# Altium PCB Wien_PCB.PcbDoc
Units mm, origin at the board's own origin, x right, y up, seen from the top; angles counter-clockwise.
Board outline 50.02 x 50.02 mm, 2 copper layers (Top Layer, Bottom Layer); 15 components, 11 nets, 39 pads, 4 vias.
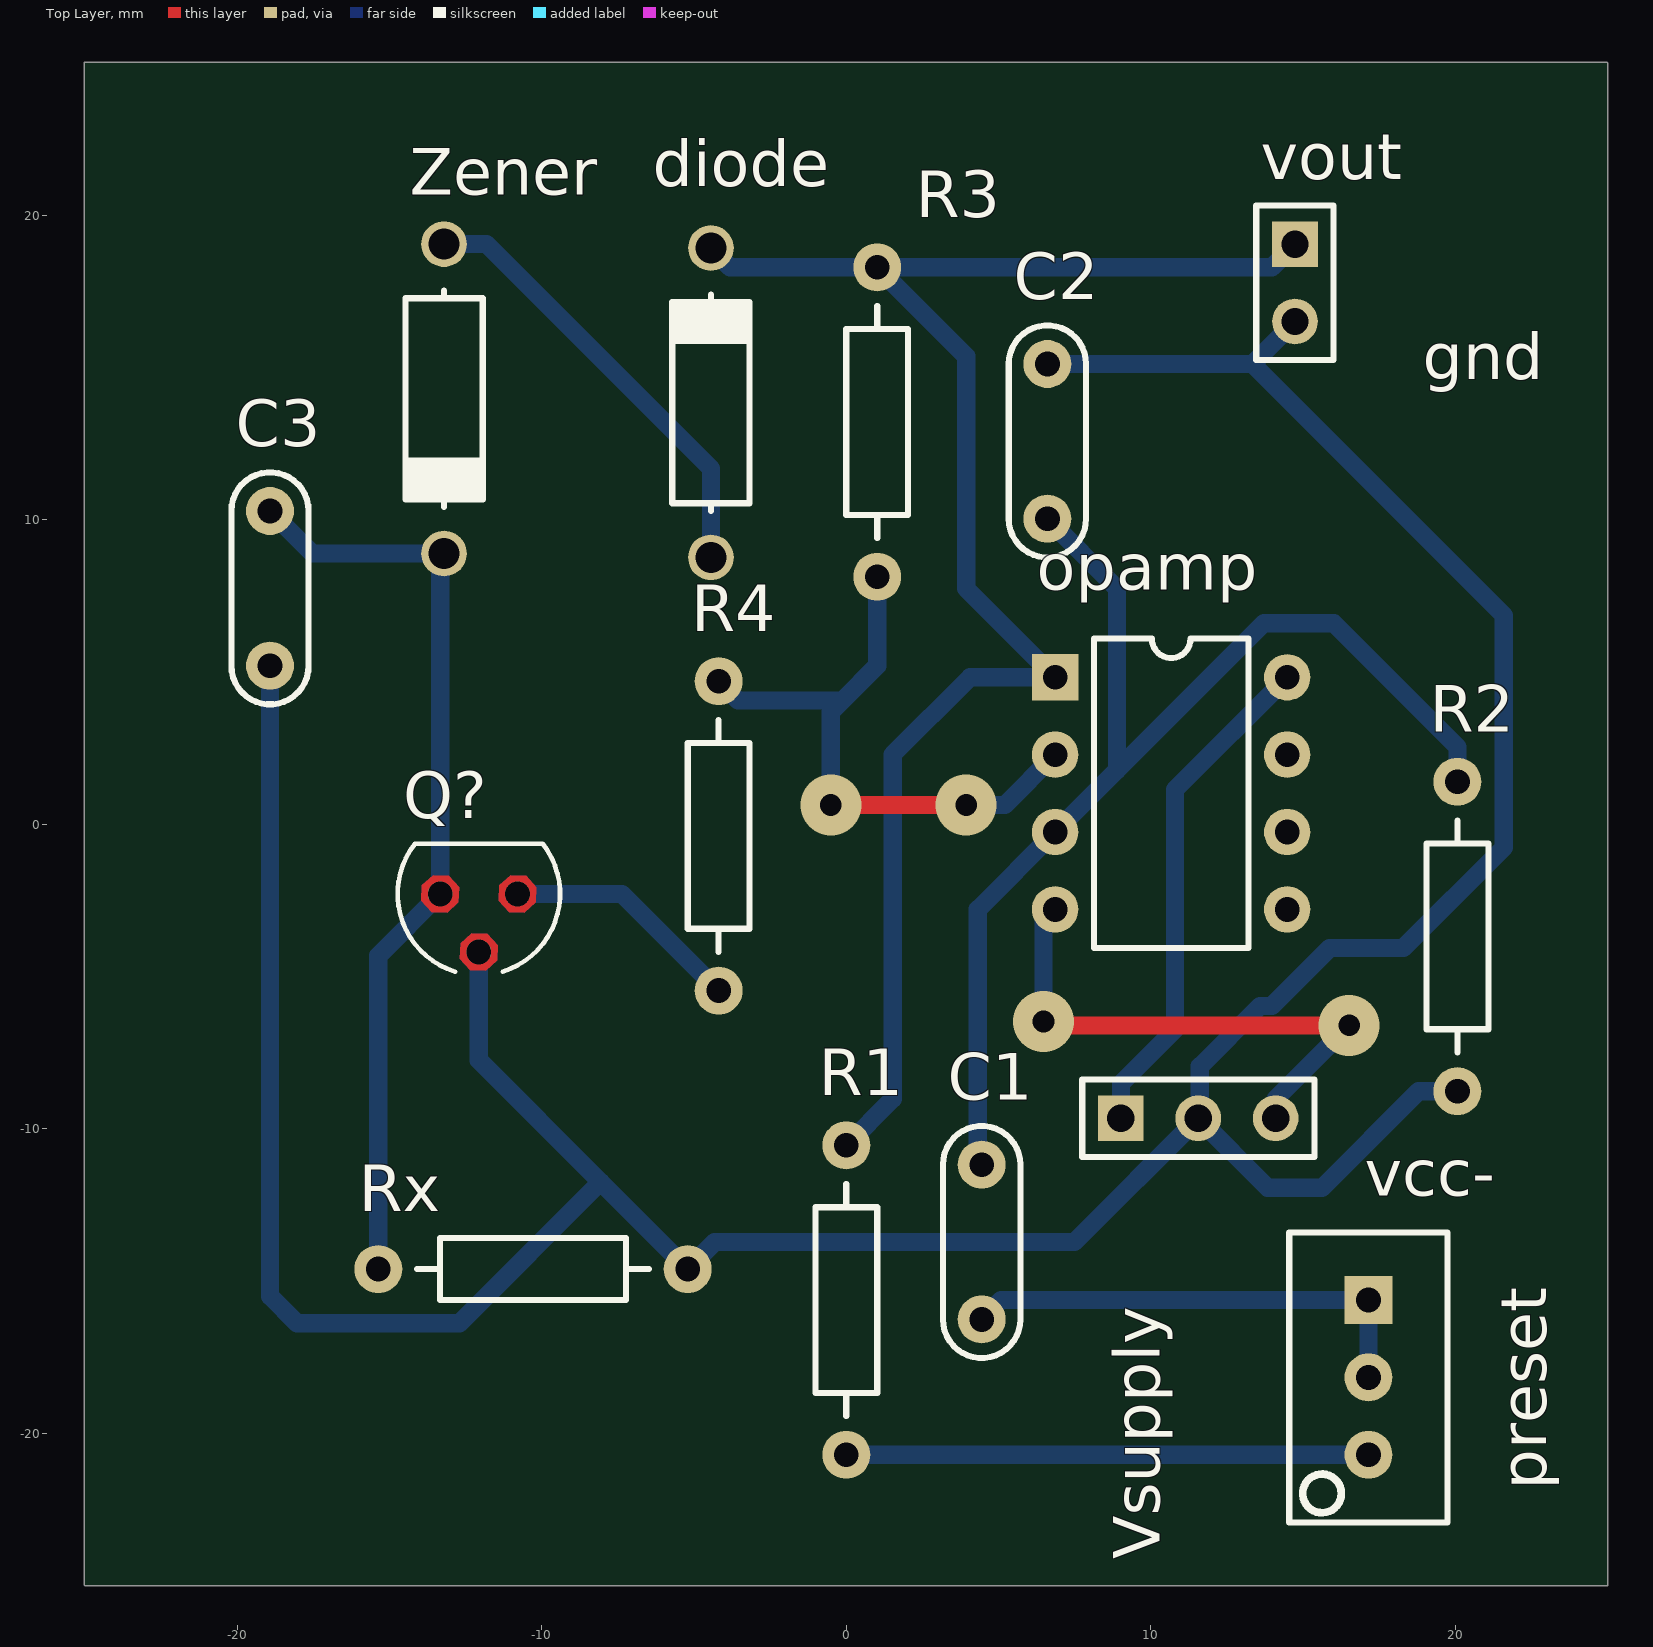
[diagram p0: Top Layer view]
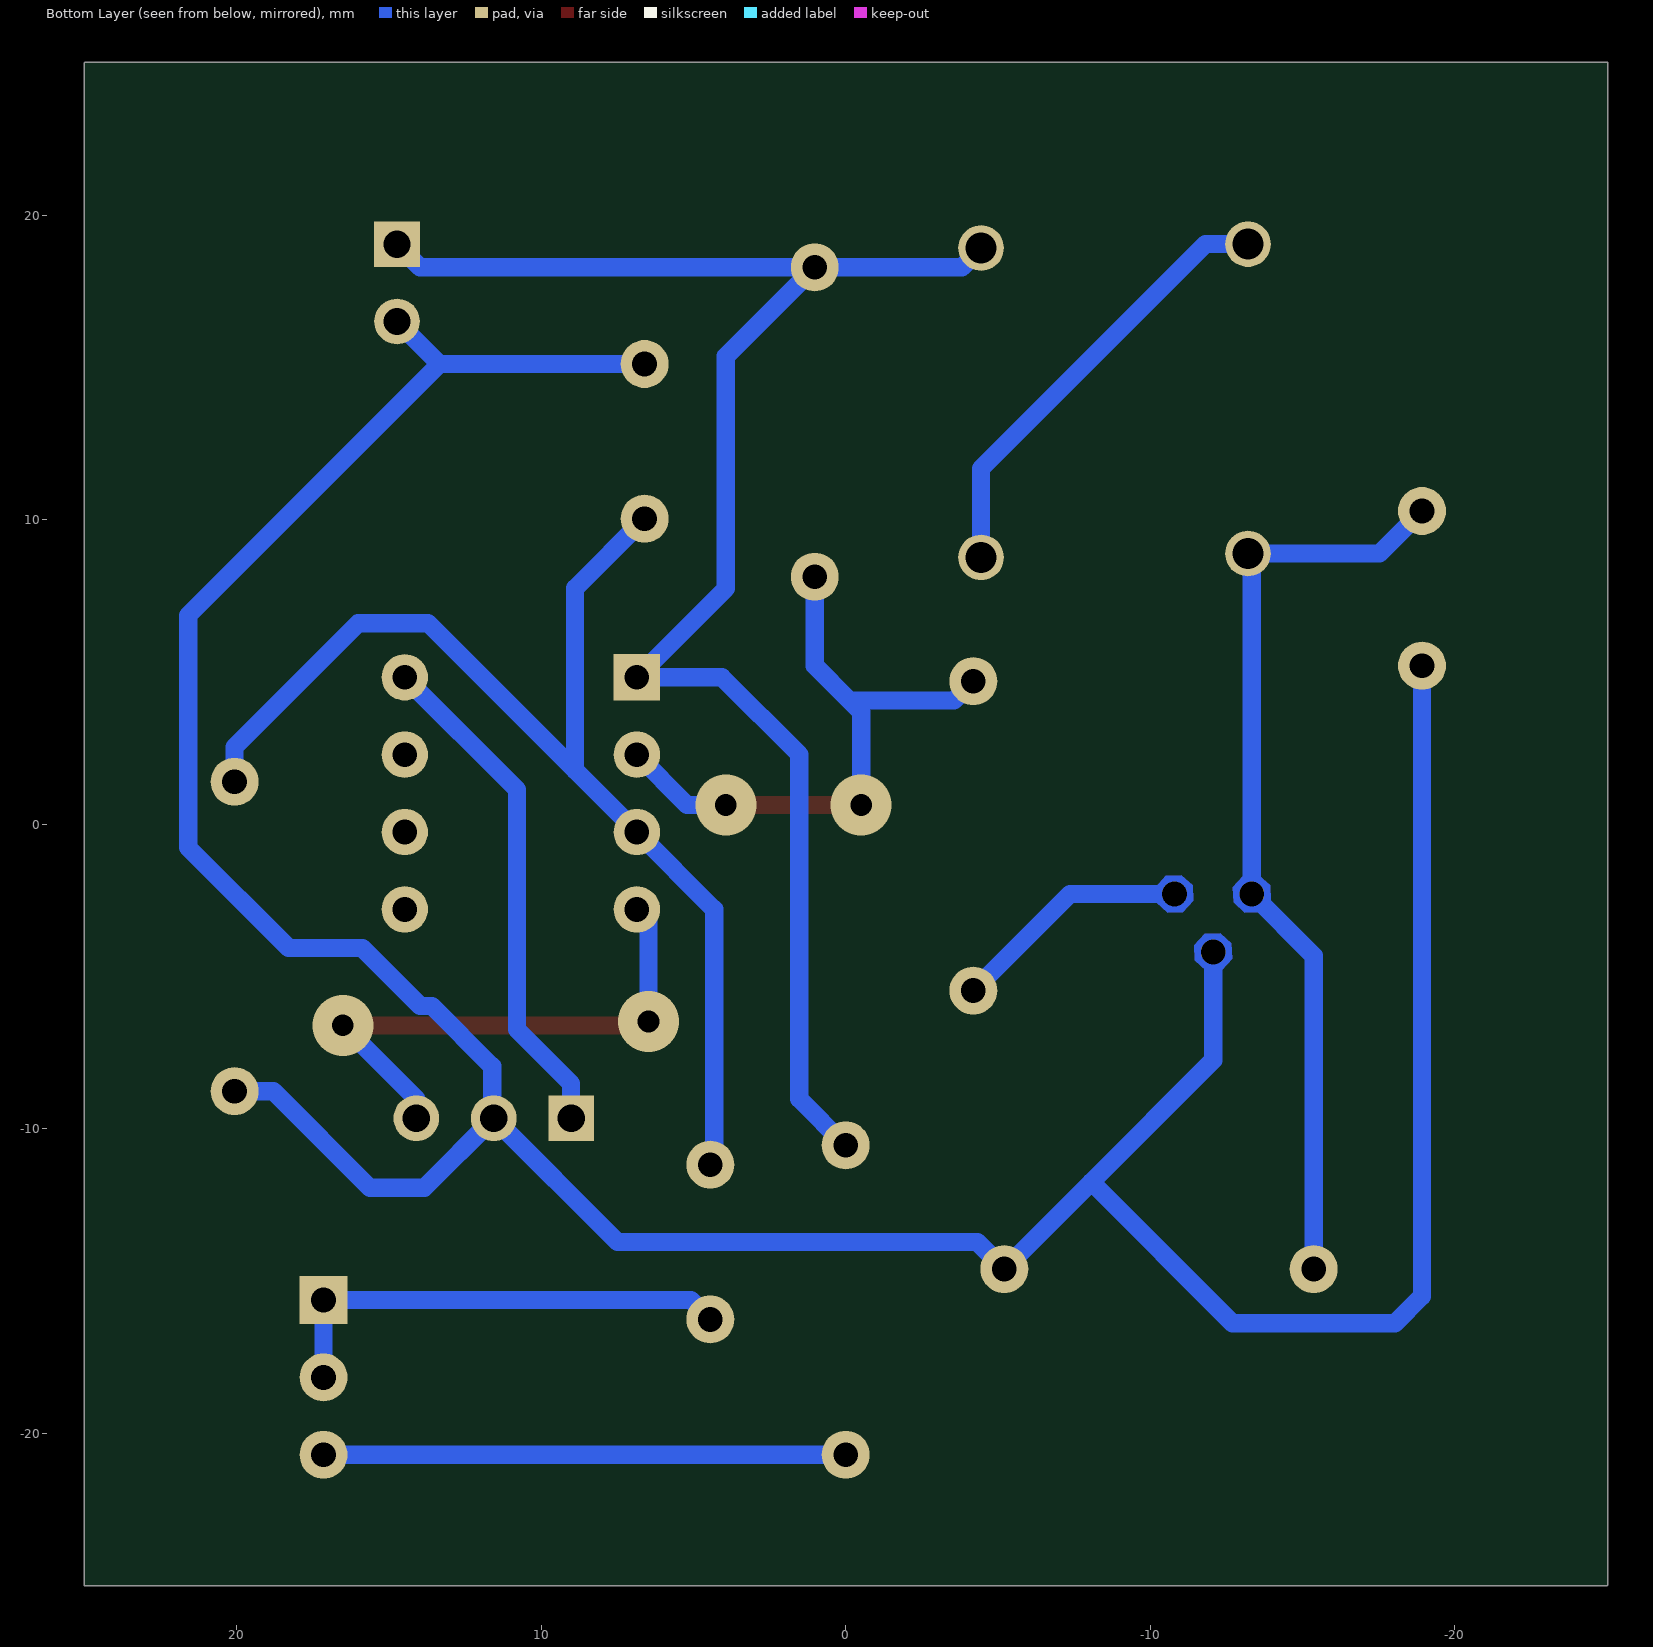
[diagram p1: Bottom Layer view, seen from below]
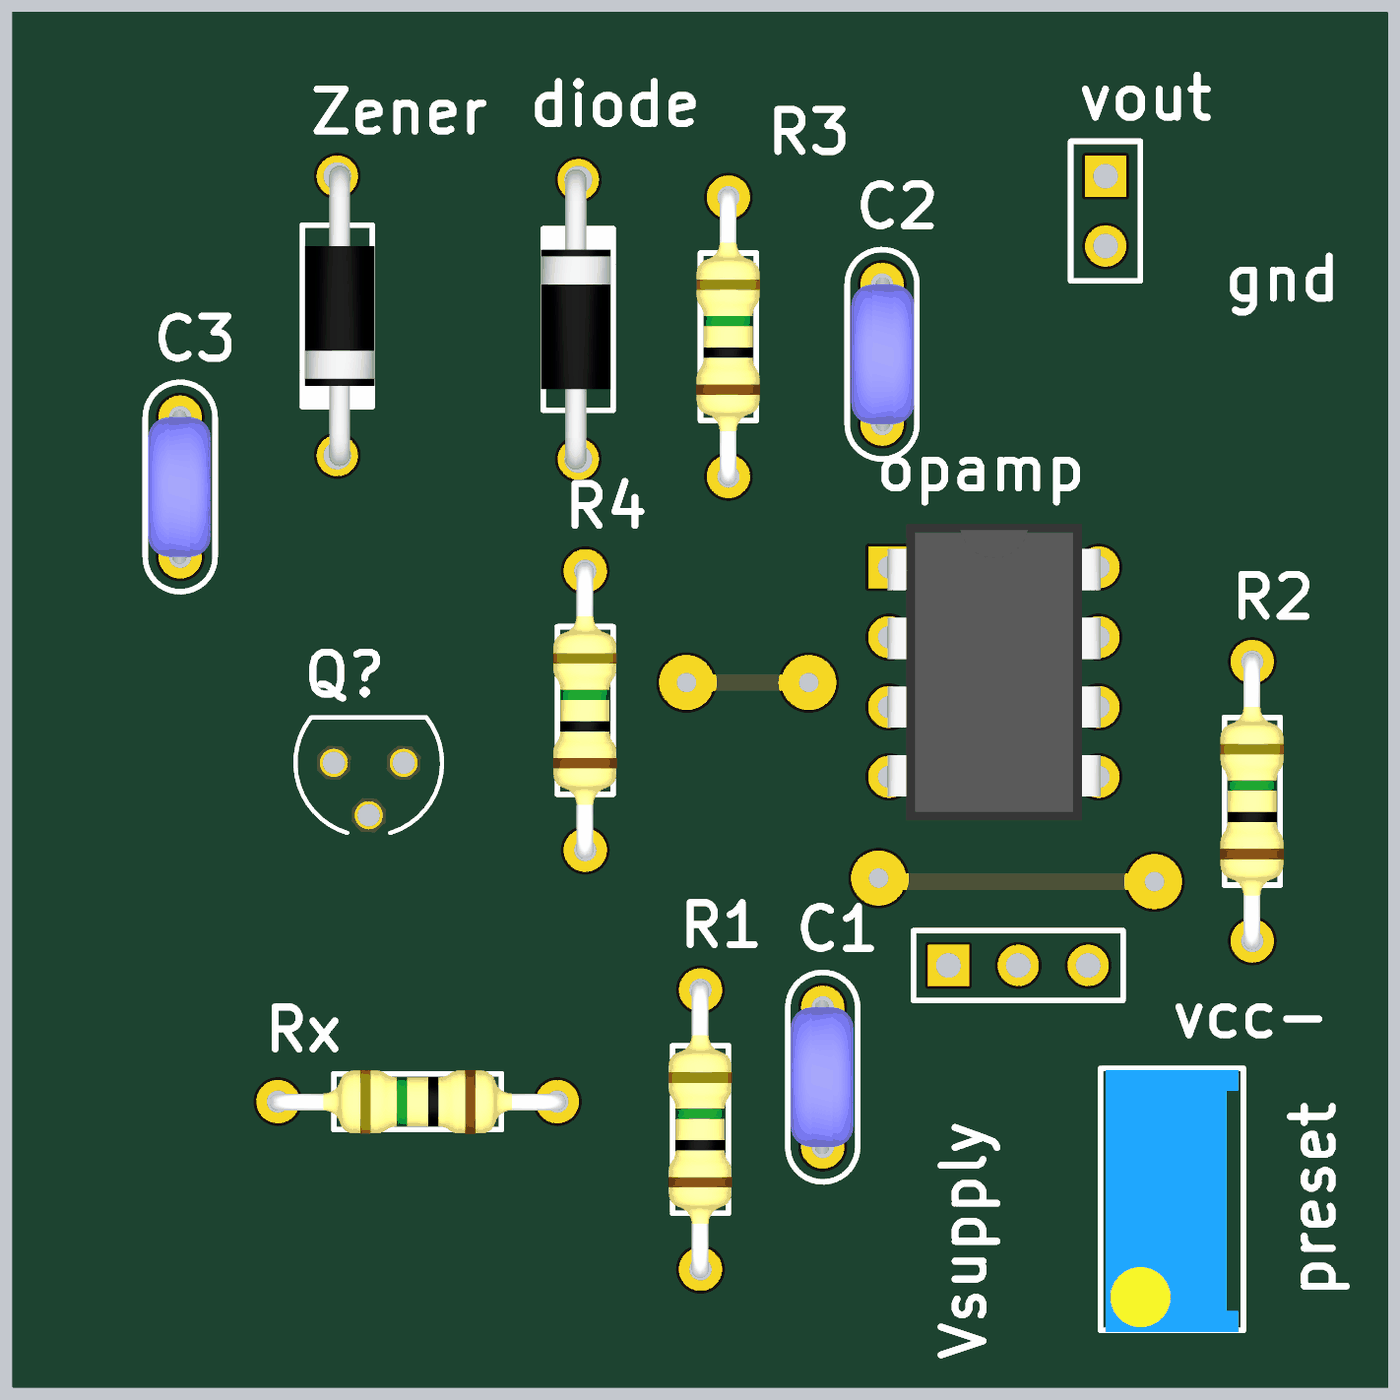
[diagram p2: 3D render of the assembled board from above, using the file's embedded part models]

## Layer stack, top to bottom
Top Solder: solder mask 0.0102, Solder Resist, Dk 3.5
Top Layer: signal copper 0.0356
Dielectric 1: dielectric 0.32, FR-4, Dk 4.8
Bottom Layer: signal copper 0.0356
Bottom Solder: solder mask 0.0102, Solder Resist, Dk 3.5

## Board outline
25,25 24.981,25.019 -25.019,25.019 -25.019,-24.981 -25,-25 25,-25

## Design rules (kind name [scope] priority, off if disabled: settings)
Clearance [All] p1: gap=0.4 ignorepadtopadclearanceinfootprint=FALSE
PolygonConnect [All] p1: connectstyle=Relief reliefconductorwidth=0.254 reliefentries=4 polygonreliefangle="90 Angle" airgapwidth=0.254
RoutingVias [All] p1: holewidth=0.5 width=2 viastyle="Through Hole" minholewidth=0.35 minwidth=1.5 maxholewidth=0.5 maxwidth=2
SolderMaskExpansion [All] p1: expansion=0.102
Width [All] p1: maxlimit=0.9 minlimit=0.6 preferedwidth=0.9
30 further rules are at their usual default settings.

## Components (designator, comment, footprint, x,y, rotation, side; value= is the part's Value field where it differs from the comment)
C1 "CAP" CAP200 4.445,-13.716 r270 top
C2 "CAP" CAP200 6.604,12.573 r90 top
C3 "CAP" CAP200 -18.923,7.747 r270 top
diode "DIODO" DO41 -4.445,13.843 r90 top
opamp "LM833" DIP8 6.858,4.826 r0 top
preset "PRESET" "PRESET V" 17.145,-18.161 r270 top
Q? "MPF102" TO92F -12.065,-2.286 r180 top
R1 "RES" RES400 0,-20.701 r90 top
R2 "RES" RES400 20.066,-8.763 r90 top
R3 "RES" RES400 1.016,8.128 r90 top
R4 "RES" RES400 -4.191,-5.461 r90 top
Rx "RES" RES400 -5.207,-14.605 r180 top
vout "vout" HDR1X2 14.732,19.05 r270 top
Vsupply "Header 3" HDR1X3 9.017,-9.652 r0 top
Zener "DIODO ZENER" DO41 -13.208,13.97 r270 top

## Footprints (in the part's own frame and the unit in brackets; to place one, negate y for a bottom-side part, rotate by r counter-clockwise, add the part's x,y. Pads: shape width x height; smd on the part's side, far side on the other; paste and mask are expansions set on the pad)
CAP200 [mil]
  round 62 hole 32: 1(-100,0) 2(100,0)
  silkscreen extent -150,-50 150,50, body extent -110,-46 110,44, height 246
DIP8 [mil]
  rect 60x60 hole 32: 1(0,0)
  round 60 hole 32: 2(0,-100) 3(0,-200) 4(0,-300) 5(300,-300) 6(300,-200) 7(300,-100) 8(300,0)
  silkscreen extent 50,-350 250,50, body extent -3,-363 303,63, height 177
DO41 [mm]
  round 1.5 hole 1.016: 1(-5.08,0) 2(5.08,0)
  silkscreen extent -3.56,-1.27 3.56,1.27, body extent -5.46,-1.19 5.46,1.37, height 2.03
HDR1X2 [mm] "Connector; Header; 2 Position"
  rect 1.5x1.5 hole 0.9: 1(0,0)
  round 1.5 hole 0.9: 2(2.54,0)
  silkscreen extent -1.27,-1.27 3.81,1.27
HDR1X3 [mm] "Connector; Header; 3 Position"
  rect 1.5x1.5 hole 0.9: 1(0,0)
  round 1.5 hole 0.9: 2(2.54,0) 3(5.08,0)
  silkscreen extent -1.27,-1.27 6.35,1.27
"PRESET V" [mil]
  rect 62x62 hole 32: 1(-100,0)
  round 62 hole 32: 2(0,0) 3(100,0)
  silkscreen extent -188,-102 188,102, body extent -185,-95 190,95, height 455
RES400 [mil]
  round 62 hole 32: 1(0,0) 2(400,0)
  silkscreen extent 50,-40 350,40, body extent -12,-45 412,46, height 96
TO92F [mil]
  round 32 hole 32: 1(-50,0) 2(0,75) 3(50,0)
  Top Layer region: -25.57,8.89 -39.01,23.56 -58.89,24.43 -73.56,10.99 -74.43,-8.89 -60.99,-23.56 -41.11,-24.43 -26.44,-10.99
  Top Layer region: 24.43,83.89 10.99,98.56 -8.89,99.43 -23.56,85.99 -24.43,66.11 -10.99,51.44 8.89,50.57 23.56,64.01
  Top Layer region: 74.43,8.89 60.99,23.56 41.11,24.43 26.44,10.99 25.57,-8.89 39.01,-23.56 58.89,-24.43 73.56,-10.99
  Bottom Layer region: -25.57,8.89 -39.01,23.56 -58.89,24.43 -73.56,10.99 -74.43,-8.89 -60.99,-23.56 -41.11,-24.43 -26.44,-10.99
  Bottom Layer region: 24.43,83.89 10.99,98.56 -8.89,99.43 -23.56,85.99 -24.43,66.11 -10.99,51.44 8.89,50.57 23.56,64.01
  Bottom Layer region: 74.43,8.89 60.99,23.56 41.11,24.43 26.44,10.99 25.57,-8.89 39.01,-23.56 58.89,-24.43 73.56,-10.99
  Multi-Layer region: -25.57,8.89 -39.01,23.56 -58.89,24.43 -73.56,10.99 -74.43,-8.89 -60.99,-23.56 -41.11,-24.43 -26.44,-10.99
  Multi-Layer region: 24.43,83.89 10.99,98.56 -8.89,99.43 -23.56,85.99 -24.43,66.11 -10.99,51.44 8.89,50.57 23.56,64.01
  Multi-Layer region: 74.43,8.89 60.99,23.56 41.11,24.43 26.44,10.99 25.57,-8.89 39.01,-23.56 58.89,-24.43 73.56,-10.99
  silkscreen extent -105,-65 105,100

## Part data
opamp: "Dual Audio Operational Amplifier"
Q?: Package=None, Availability=Unavailable, MF="Freescale Semiconductor", MP=MPF102, Price=None, SnapEDA_Link=https://www.snapeda.com/parts/MPF102/Freescale%20Semiconductor/view-part/?ref=snap
vout: library part "Header 2", "Header, 2-Pin", LatestRevisionDate=17-Jul-2002, LatestRevisionNote="Re-released for DXP Platform.", Publisher="Altium Limited"
Vsupply: "Header, 3-Pin", LatestRevisionDate=17-Jul-2002, LatestRevisionNote="Re-released for DXP Platform.", Publisher="Altium Limited"

## Via types
v1: diameter 2, hole 0.711, Top Layer to Bottom Layer, 4 vias

## Nets (pads, with @x,y where several pads share a name; then routed paths per layer and width w, separated by ;. In a path a pad name is that pad's centre, name@x,y a point inside that pad or via, vN(x,y) a via of type N, cw(c..) or ccw(c..) an arc to the next point about the centre after c; other vN are vias at no path point)
GND: C2.2 C3.2 Q?.2 R2.1 Rx.1 vout.2 Vsupply.2 | length 119.4
  Bottom Layer w0.6: C3.2 -18.923,-15.494 -18.034,-16.383 -12.7,-16.383 -8.064,-11.747 ; Q?.2 -12.065,-7.747 -8.064,-11.747 ; C2.2 13.335,15.113 ; vout.2 13.335,15.113 ; R2.1 18.796,-8.763 15.621,-11.938 13.843,-11.938 Vsupply.2 ; -8.064,-11.747 Rx.1 -4.318,-13.716 7.493,-13.716 Vsupply.2 ; Vsupply.2 11.61,-9.599 11.61,-7.948 13.589,-5.969 13.97,-5.969 15.875,-4.064 18.288,-4.064 21.59,-0.762 21.59,6.858 13.335,15.113
NetC1_1: C1.1 C2.1 opamp.3 R2.2 | length 40.1
  Bottom Layer w0.6: C1.1 4.318,-11.049 4.318,-2.794 opamp.3 8.89,1.778 ; C2.1 8.89,7.747 8.89,1.778 ; R2.2 20.066,2.54 16.002,6.604 13.716,6.604 8.89,1.778
NetC1_2: C1.2 preset.1 preset.2 | length 15.5
  Bottom Layer w0.6: C1.2 5.08,-15.621 preset.1 preset.2
NetC3_1: C3.1 Q?.3 Rx.2 Zener.2 | length 30.7
  Bottom Layer w0.6: C3.1 -17.526,8.89 Zener.2 -13.335,8.763 Q?.3 -15.367,-4.318 Rx.2
Netdiode_1: diode.1 Zener.1 | length 14.7
  Bottom Layer w0.6: Zener.1 -11.811,19.05 -4.445,11.684 diode.1
Netdiode_2: diode.2 opamp.1 R1.2 R3.2 vout.1 | length 55.5
  Bottom Layer w0.6: diode.2 -3.81,18.288 R3.2 ; R1.2 1.524,-9.017 1.524,2.286 4.064,4.826 opamp.1 3.937,7.747 3.937,15.367 R3.2 ; vout.1 13.97,18.288 R3.2
Netopamp_2: opamp.2 R3.1 R4.2 | length 20.5
  Top Layer w0.6: v1(-0.508,0.635) v1(3.937,0.635)
  Bottom Layer w0.6: R4.2 -3.556,4.064 -0.127,4.064 ; v1(-0.508,0.635) -0.508,3.683 -0.127,4.064 ; R3.1 1.016,5.207 -0.127,4.064 ; v1(3.937,0.635) 5.207,0.635 opamp.2
Netpreset_3: preset.3 R1.1 | length 17.1
  Bottom Layer w0.6: R1.1 preset.3
NetQ?_1: Q?.1 R4.1 | length 7.9
  Bottom Layer w0.6: Q?.1 -7.366,-2.286 R4.1
Vcc+: opamp.8 Vsupply.1 | length 16.7
  Bottom Layer w0.6: Vsupply.1 9.017,-8.509 10.795,-6.731 10.795,1.143 opamp.8
Vcc-: opamp.4 Vsupply.3 | length 18
  Top Layer w0.6: v1(6.477,-6.477) 6.604,-6.604 v1(16.51,-6.604)
  Bottom Layer w0.6: v1(6.477,-6.477) 6.477,-3.175 opamp.4 ; Vsupply.3 14.097,-9.017 v1(16.51,-6.604)
pads on no net: opamp.5 opamp.6 opamp.7

## Silkscreen, mask and mechanical layers (free items; w line width, h text height)
Top Overlay:
  text "gnd" at 18.923,14.605 h1.52
  text "vcc-" at 17.018,-12.192 h1.52